# Altium PCB SC8701_EVM_RE1_0624_M6.PcbDoc
Units mm, origin at the board's own origin, x right, y up, seen from the top; angles counter-clockwise.
Board outline 100 x 65 mm, 2 copper layers (Top Layer, Bottom Layer), stack 1.535 mm thick; 126 components, 56 nets, 343 pads, 387 vias.
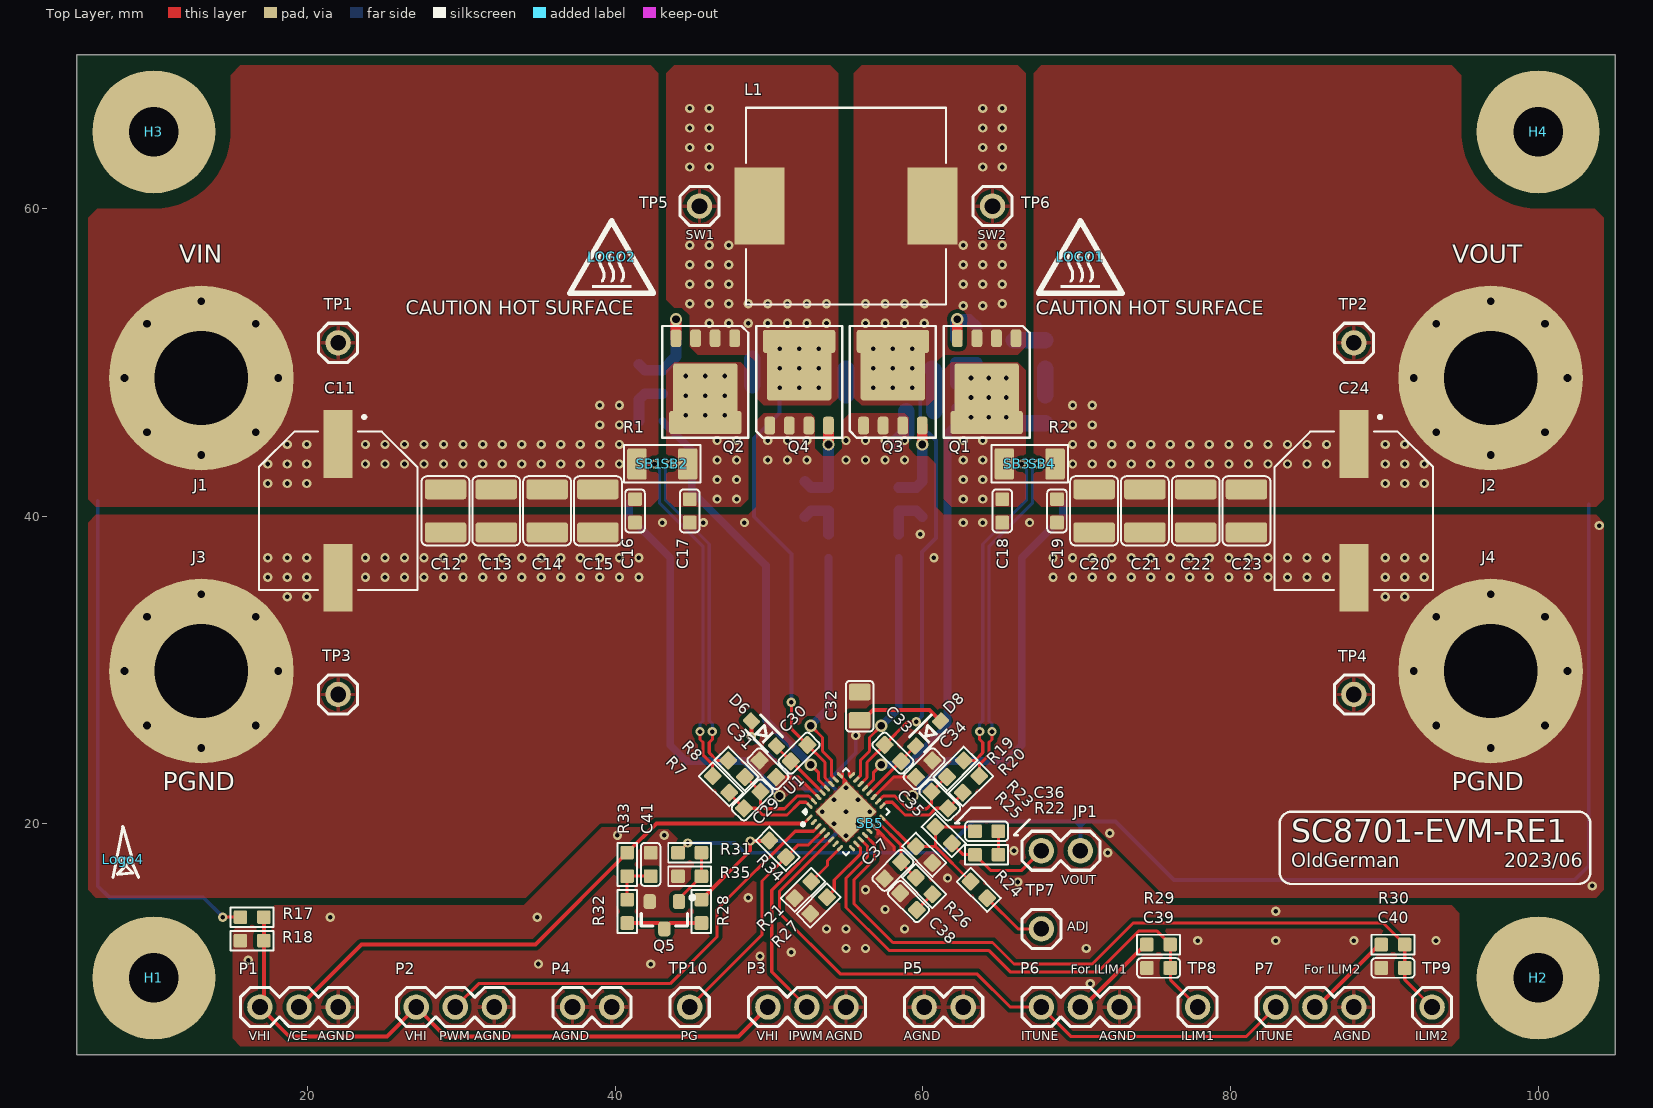
[diagram p0: Top Layer view]
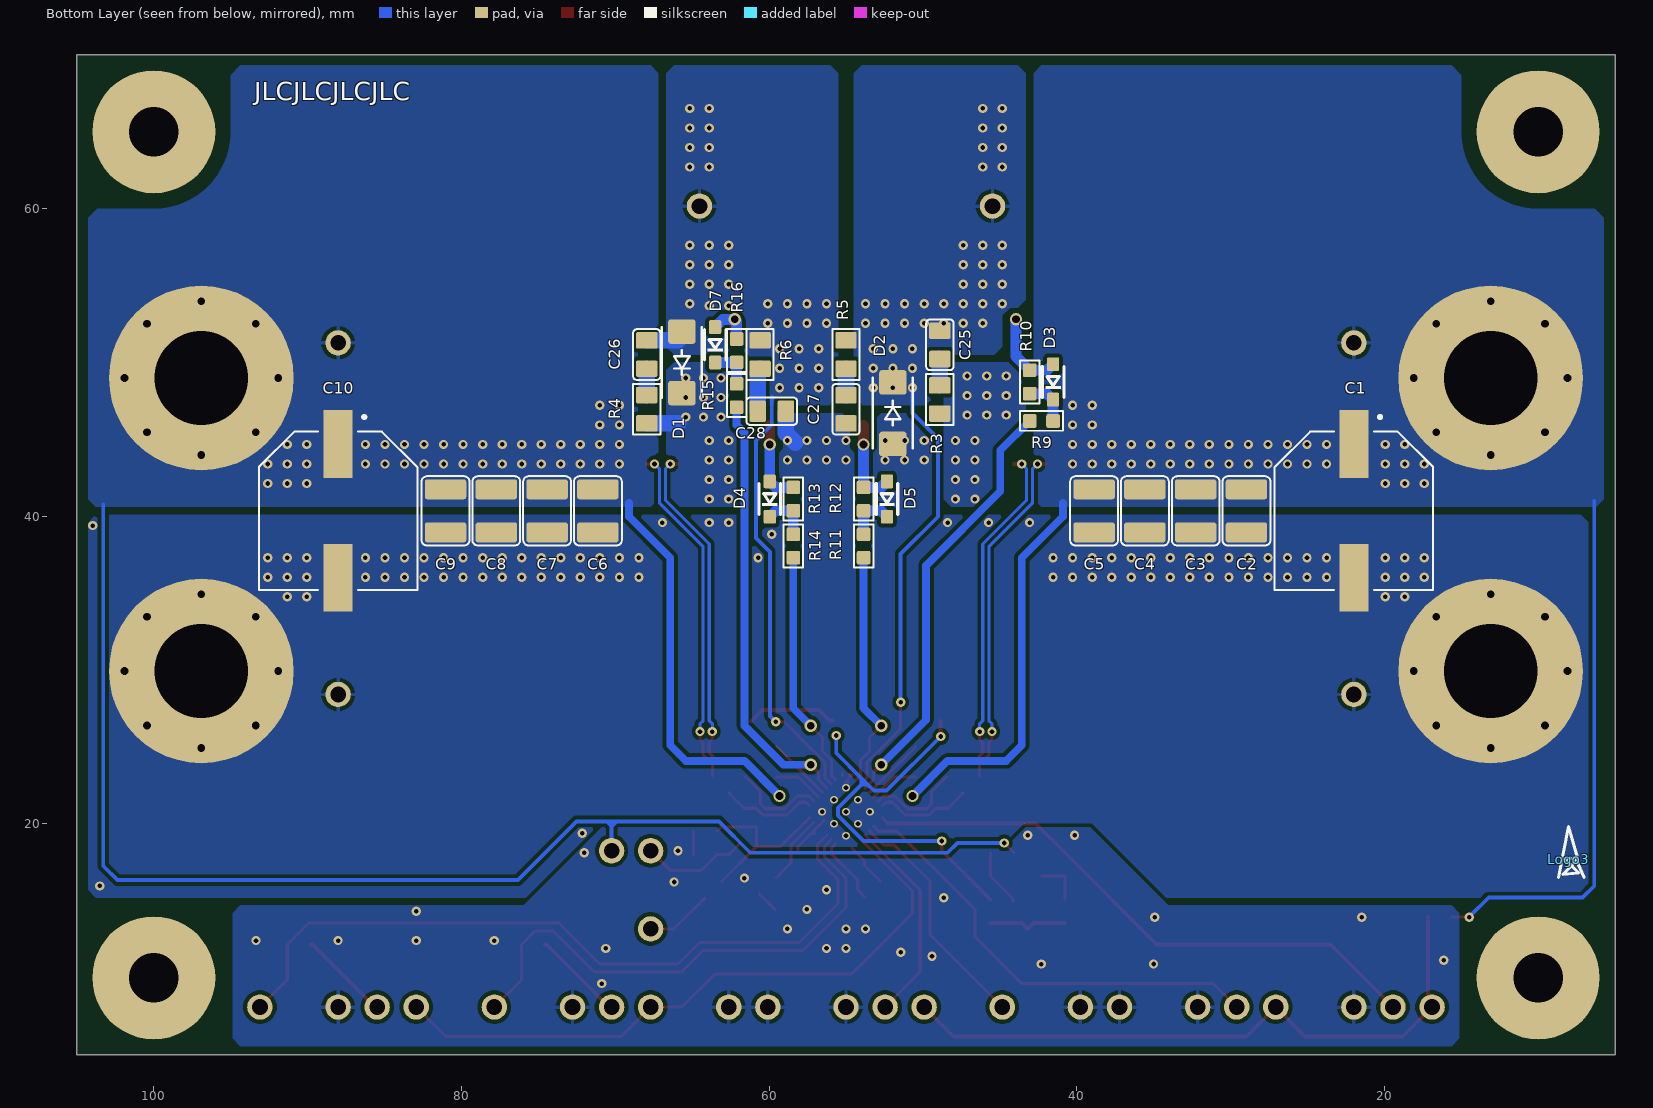
[diagram p1: Bottom Layer view, seen from below]
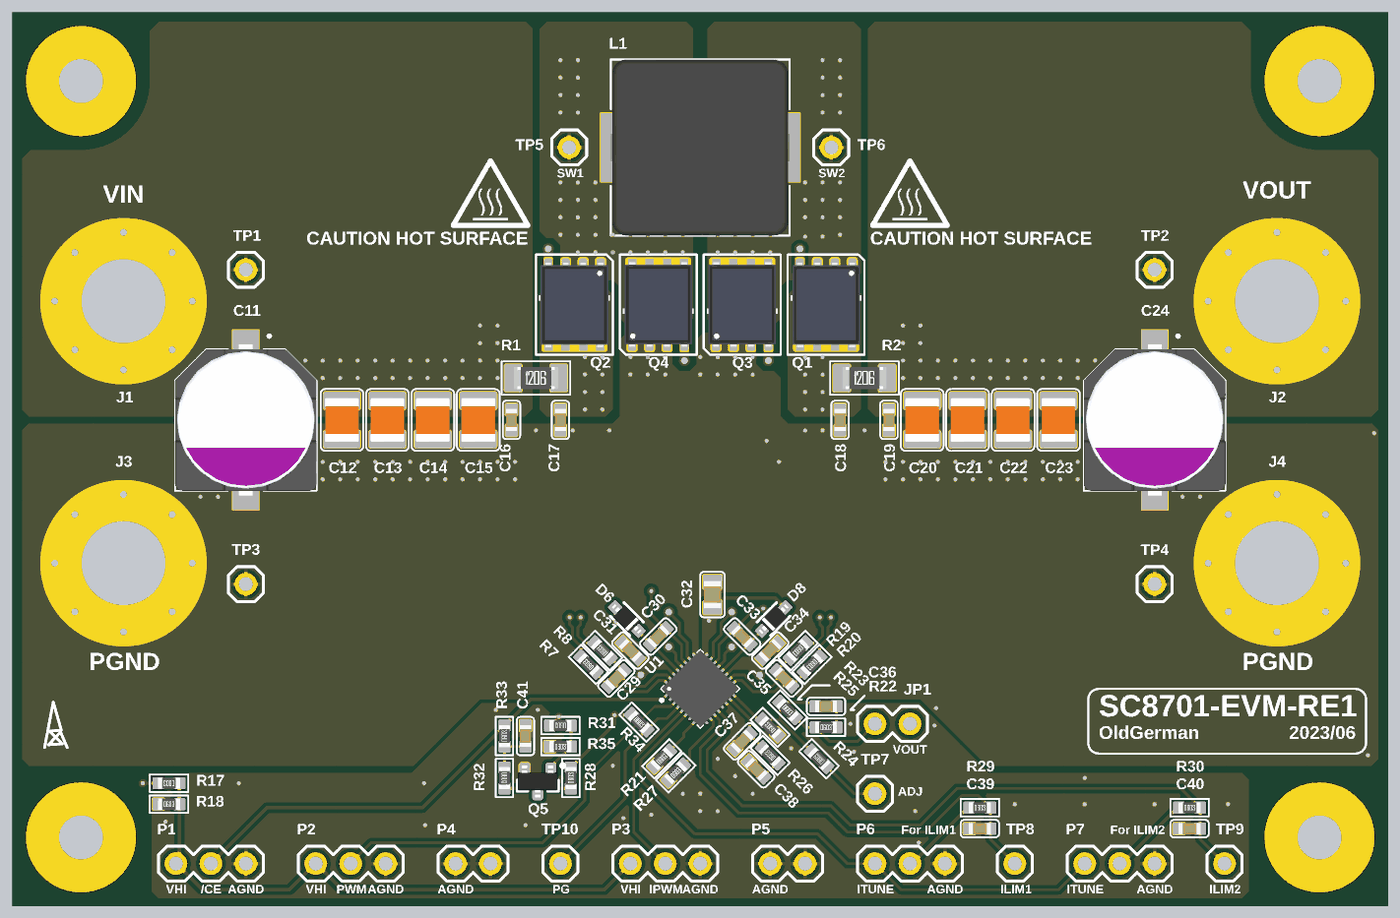
[diagram p2: 3D render of the assembled board from above, using the file's embedded part models]
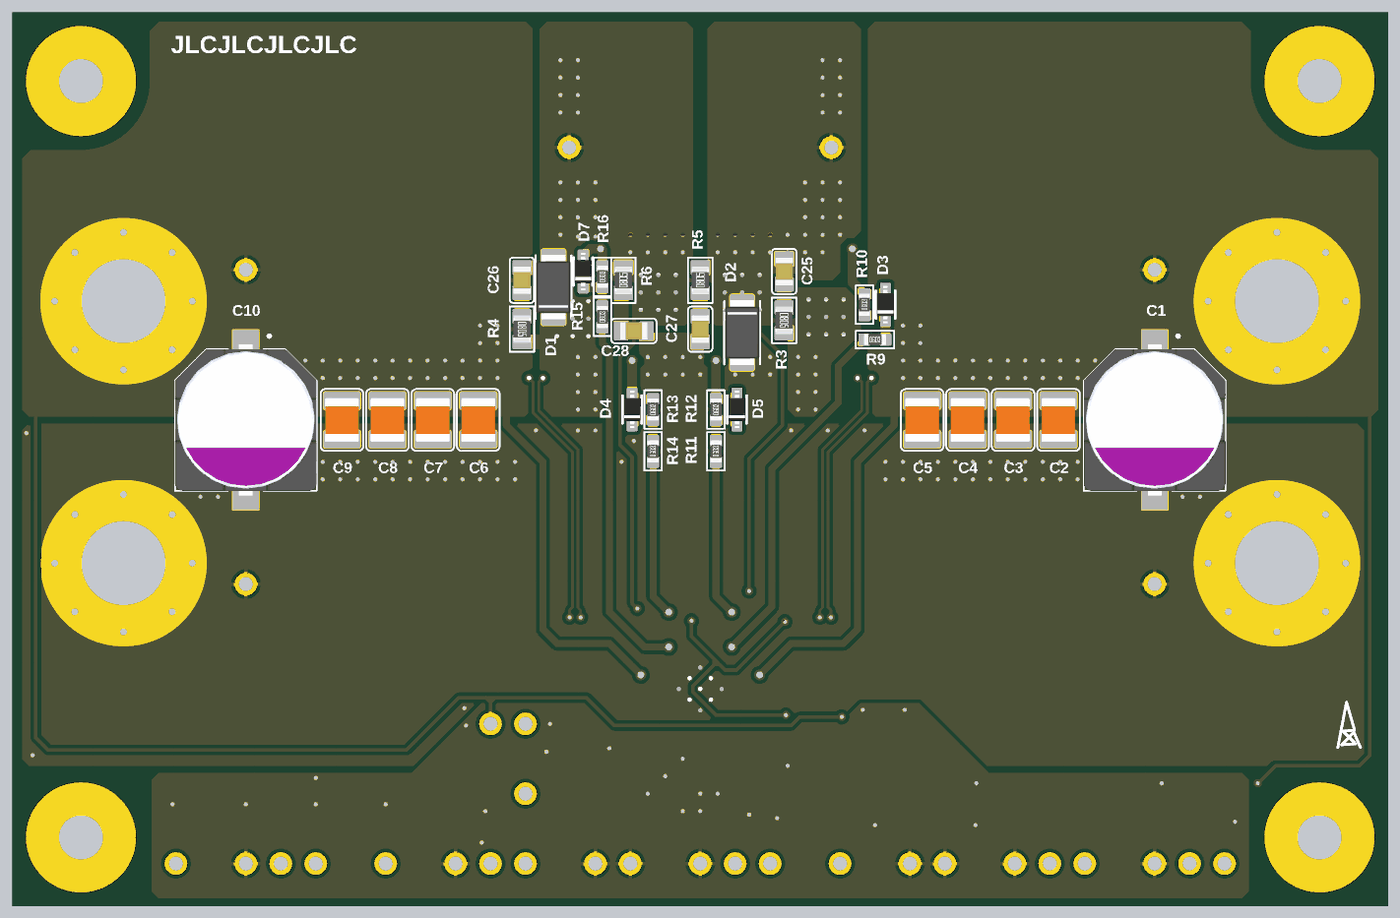
[diagram p3: 3D render of the assembled board from below, using the file's embedded part models]

## Layer stack, top to bottom
Top Solder: solder mask 0.0102, Solder Resist, Dk 3.5
Top Layer: signal copper 0.035
Dielectric2: core 1.465, Dk 4.2
Bottom Layer: signal copper 0.035
Bottom Solder: solder mask 0.0102, Solder Resist, Dk 3.5

## Board outline
5,5 5,70 105,70 105,5

## Design rules (kind name [scope] priority, off if disabled: settings)
BoardOutlineClearance [All] p1: gap=0.3 ignorepadtopadclearanceinfootprint=FALSE except(0: Arc-SplitContinuation Track-SplitContinuation SMDPad-SplitContinuation THPad-SplitContinuation Via-SplitContinuation Fill-SplitContinuation Poly-SplitContinuation Region-SplitContinuation Text-SplitContinuation)
Clearance "Stitching VOUT" [IsStitchingVia and InNet('VOUT') vs (IsVia and (Not IsStitchingVia)) Or IsPad] p1: gap=0.127 ignorepadtopadclearanceinfootprint=FALSE
Clearance "PGND vs via" [(InNet('GND') AND InPolygon) vs IsVia] p2: gap=0.305 ignorepadtopadclearanceinfootprint=FALSE except(0: Arc-Hole Track-Hole SMDPad-Hole THPad-Hole Via-Hole Fill-Hole Poly-Hole Region-Hole Text-Hole)
Clearance "pour clearance_1" [InPolygon] p3: gap=0.254 ignorepadtopadclearanceinfootprint=FALSE except(0: Arc-Hole Track-Hole SMDPad-Hole THPad-Hole Via-Hole Fill-Hole Poly-Hole Region-Hole Text-Hole)
Clearance [All] p4: gap=0.198 ignorepadtopadclearanceinfootprint=FALSE except(0: Arc-Hole Track-Hole SMDPad-Hole THPad-Hole Via-Hole Fill-Hole Poly-Hole Region-Hole Text-Hole; 0.15: Arc-Via Track-Via SMDPad-SMDPad)
DiffPairsRouting [All] p1: maxlimit=0.254 minlimit=0.2 mostfreqgap=0.2 toplayer_minwidth=0.2 toplayer_maxwidth=0.381 toplayer_prefwidth=0.2 bottomlayer_minwidth=0.2 bottomlayer_maxwidth=0.381 bottomlayer_prefwidth=0.2 maxuncoupledlength=12.7
HoleSize [All] p1: absolutevalues=TRUE maxlimit=6.858 minlimit=0.279 maxpercent=80.000 minpercent=20.000
MinimumSolderMaskSliver [All] p1: minsoldermaskwidth=0
PolygonConnect HOLE_J1-J4 [InComponent('J1') OR InComponent('J2') OR InComponent('J3') OR InComponent('J4')] p1: connectstyle=Direct reliefconductorwidth=0.254 reliefentries=4 polygonreliefangle="90 Angle" airgapwidth=0.254
PolygonConnect HOLE [All] p2: thpad.connectstyle=Relief thpad.reliefconductorwidth=0.254 thpad.reliefentries=4 thpad.polygonreliefangle="90 Angle" thpad.airgapwidth=0.254 smdpad.connectstyle=Direct smdpad.reliefconductorwidth=0.254 smdpad.reliefentries=4 smdpad.polygonreliefangle="90 Angle" smdpad.airgapwidth=0.254 via.connectstyle=Direct via.reliefconductorwidth=0.254 via.reliefentries=4 via.polygonreliefangle="90 Angle" via.airgapwidth=0.254
PolygonConnect [All] p3: connectstyle=Direct reliefconductorwidth=0.254 reliefentries=4 polygonreliefangle="90 Angle" airgapwidth=0.254
RoutingVias [All] p1: holewidth=0.3 width=0.6 viastyle="Through Hole" minholewidth=0.3 minwidth=0.6 maxholewidth=1 maxwidth=2
ShortCircuit [InNet('AGND') vs InNet('PGND')] p1: allowed=TRUE
SilkToSilkClearance [All] p1 off: silktosilkclearance=0.178
SilkToSolderMaskClearance [IsPad] p1 off: minsilkscreentomaskgap=0.178 clearancetoexposedcopper=TRUE
SolderMaskExpansion SolderMaskExpansion_Via [ObjectKind = 'Via'] p1: expansion=0.051 istentingtop=TRUE
SolderMaskExpansion [All] p2: expansion=0.051 istentingtop=FALSE
Width [All] p1: maxlimit=2.54 minlimit=0.2 preferedwidth=0.2
24 further rules are at their usual default settings.

## Classes and differential pairs
differential pair SNS2: +SNS2_P -SNS2_N
differential pair SNS1: +SNS1_P -SNS1_N
differential pair .SNS2: +.SNS2_P -.SNS2_N
differential pair .SNS1: +.SNS1_P -.SNS1_N

## Components (designator, comment, footprint, x,y, rotation, side; value= is the part's Value field where it differs from the comment)
C1 "100uF/50V" "CAP OS-CON D=10.0 L=10.0 F10" 21.98,40.358 r270 bottom
C2 "10uF/50V" C1210 28.965,40.358 r90 bottom
C3 "10uF/50V" C1210 32.267,40.358 r90 bottom
C4 "10uF/50V" C1210 35.569,40.358 r90 bottom
C5 "10uF/50V" C1210 38.871,40.358 r90 bottom
C6 "10uF/50V" C1210 71.129,40.358 r90 bottom
C7 "10uF/50V" C1210 74.431,40.358 r90 bottom
C8 "10uF/50V" C1210 77.733,40.358 r90 bottom
C9 "10uF/50V" C1210 81.035,40.358 r90 bottom
C10 "100uF/50V" "CAP OS-CON D=10.0 L=10.0 F10" 88.02,40.358 r270 bottom
C11 "100uF/50V" "CAP OS-CON D=10.0 L=10.0 F10" 21.98,40.358 r270 top
C12 "10uF/50V" C1210 28.965,40.358 r90 top
C13 "10uF/50V" C1210 32.267,40.358 r90 top
C14 "10uF/50V" C1210 35.569,40.358 r90 top
C15 "10uF/50V" C1210 38.871,40.358 r90 top
C16 "100nF/50V" C0603 41.284,40.358 r90 top
C17 "100nF/50V" C0603 44.84,40.358 r90 top
C18 "100nF/50V" C0603 65.16,40.358 r90 top
C19 "100nF/50V" C0603 68.716,40.358 r90 top
C20 "10uF/50V" C1210 71.129,40.358 r90 top
C21 "10uF/50V" C1210 74.431,40.358 r90 top
C22 "10uF/50V" C1210 77.733,40.358 r90 top
C23 "10uF/50V" C1210 81.035,40.358 r90 top
C24 "100uF/50V" "CAP OS-CON D=10.0 L=10.0 F10" 88.02,40.358 r270 top
C25 "NPO/NC" C0805 48.897,51.152 r270 bottom
C26 "NPO/NC" C0805 67.954,50.518 r270 bottom
C27 "NPO/NC" C0805 55,46.962 r90 bottom
C28 "NPO/NC" C0805 59.826,46.835 r0 bottom
C29 "47pF/6.3V" C0603 48.904,21.562 r45 top
C30 "100nF/16V" C0603 51.952,24.61 r45 top
C31 "1uF/50V" C0603 49.92,23.594 r135 top
C32 "1uF/25V" C0805 55.889,27.658 r90 top
C33 "100nF/16V" C0603 58.048,24.61 r315 top
C34 "1uF/50V" C0603 60.08,23.594 r45 top
C35 "47pF/6.3V" C0603 61.096,21.562 r315 top
C36 "NC" C0603 64.144,19.53 r0 top
C37 "NC" C0603 58.048,16.99 r45 top
C38 "15nF/6.3V" C0603 59.064,14.958 r315 top
C39 "10nF/6.3V" C0603 75.32,10.64 r0 top
C40 "10nF/6.3V" C0603 90.56,10.64 r0 top
C41 "1uF/50V" C0603 42.3,17.371 r90 top
D1 "SS54F" SMAF 65.668,50.01 r270 bottom
D2 "SS54F" SMAF 51.952,46.708 r90 bottom
D3 "1N4148" SOD-323 41.538,48.74 r270 bottom
D4 "1N4148" SOD-323 59.953,41.12 r270 bottom
D5 "1N4148" SOD-323 52.333,41.12 r270 bottom
D6 "1N4148" SOD-323 49.666,25.88 r315 top
D7 "1N4148" SOD-323 63.509,51.153 r270 bottom
D8 "1N4148" SOD-323 60.334,25.88 r225 top
H1 "HOLE" "M3.2 D=8" 10,10 r0 top
H2 "HOLE" "M3.2 D=8" 100,10 r0 top
H3 "HOLE" "M3.2 D=8" 10,65 r0 top
H4 "HOLE" "M3.2 D=8" 100,65 r0 top
J1 "U6047" JACK_BANANA_4MM_M6_GE 13.09,48.994 r180 top
J2 "U6047" JACK_BANANA_4MM_M6_GE 96.91,48.994 r270 top
J3 "U6047" JACK_BANANA_4MM_M6_GE 13.09,29.944 r180 top
J4 "U6047" JACK_BANANA_4MM_M6_GE 96.91,29.944 r270 top
JP1 "CONN_X2_DOT" 2.54mm_Male_x2 70.24,18.26 r180 top
L1 "3.3uH" "INDUCTOR 1350 12.6X13.5X5.0mm" 55,60.17 r0 top locked
LOGO1 "CAUTION HOT SURFACE" IEC_HotSurface_Small 70.24,56.868 r0 top
LOGO2 "CAUTION HOT SURFACE" IEC_HotSurface_Small 39.76,56.868 r0 top
Logo3 "OldGerman Symbol" ODG_LOGO 8.01,17.701 r180 bottom
Logo4 "OldGerman Symbol" ODG_LOGO 8.01,17.701 r0 top
P1 "CONN_X3" 2.54mm_Male_x3 16.9,8.1 r0 top
P2 "CONN_X3" 2.54mm_Male_x3 32.14,8.1 r180 top
P3 "CONN_X3" 2.54mm_Male_x3 55,8.1 r180 top
P4 "CONN_X2" 2.54mm_Male_x2 37.22,8.1 r0 top
P5 "CONN_X2" 2.54mm_Male_x2 60.08,8.1 r0 top
P6 "CONN_X3" 2.54mm_Male_x3 67.7,8.1 r0 top
P7 "CONN_X3" 2.54mm_Male_x3 88.02,8.1 r180 top
Q1 "N-MOS_GDS" "SO8FL ROUND" 64.144,48.74 r270 top
Q2 "N-MOS_GDS" "SO8FL ROUND" 45.856,48.74 r270 top
Q3 "N-MOS_GDS" "SO8FL ROUND" 58.048,48.74 r90 top
Q4 "N-MOS_GDS" "SO8FL ROUND" 51.952,48.74 r90 top
Q5 "N-MOS" "INFINEON SOT-23-3" 43.189,14.069 r270 top
R1 "10mR" R1206 43.062,43.406 r0 top
R2 "10mR" R1206 66.938,43.406 r0 top
R3 "NC" R0805 48.904,47.597 r270 bottom
R4 "NC" R0805 67.954,46.962 r270 bottom
R5 "NC" R0805 55,50.518 r90 bottom
R6 "NC" R0805 60.588,50.518 r90 bottom
R7 "1K" R0603 46.872,22.578 r135 top
R8 "1K" R0603 47.888,23.594 r135 top
R9 "0R" R0603 42.3,46.2 r180 bottom
R10 "0R" R0603 43.062,48.74 r90 bottom
R11 "0R" R0603 53.857,38.072 r90 bottom
R12 "0R" R0603 53.857,41.12 r90 bottom
R13 "0R" R0603 58.429,41.12 r90 bottom
R14 "0R" R0603 58.429,38.072 r90 bottom
R15 "0R" R0603 62.112,47.851 r90 bottom
R16 "0R" R0603 62.112,50.772 r90 bottom
R17 "100K" R0603 16.392,13.942 r180 top
R18 "150K" R0603 16.392,12.418 r0 top
R19 "1K" R0603 62.112,23.594 r225 top
R20 "1K" R0603 63.128,22.578 r225 top
R21 "0R" R0603 52.206,15.72 r45 top
R22 "NC" R0603 64.144,18.006 r0 top
R23 "100K" R0603 61.35,19.276 r315 top
R24 "NC" R0603 63.636,15.72 r135 top
R25 "32.4K" R0603 60.08,18.006 r135 top
R26 "15K" R0603 60.08,15.974 r135 top
R27 "68K" R0603 53.222,14.704 r45 top
R28 "200K" R0603 45.602,14.323 r90 top
R29 "12.1K" R0603 75.32,12.164 r0 top
R30 "40.2K" R0603 90.56,12.164 r0 top
R31 "10K" R0603 44.84,18.133 r180 top
R32 "100K" R0603 40.776,14.323 r270 top
R33 "100K" R0603 40.776,17.371 r90 top
R34 "100K" R0603 50.555,18.387 r315 top
R35 "24K" R0603 44.84,16.609 r0 top
SB1 "NetTie_200um" NetTie_200um 42.254,43.406 r180 top net-tie
SB2 "NetTie_200um" NetTie_200um 43.87,43.406 r0 top net-tie
SB3 "NetTie_200um" NetTie_200um 66.13,43.406 r180 top net-tie
SB4 "NetTie_200um" NetTie_200um 67.746,43.406 r0 top net-tie
SB5 "NetTie_200um" NetTie_200um 56.591,20.058 r135 top net-tie
TP1 "CONN_X1_DOT" 2.54mm_Male_x1 21.98,51.28 r0 top
TP2 "CONN_X1_DOT" 2.54mm_Male_x1 88.02,51.28 r0 top
TP3 "CONN_X1_DOT" 2.54mm_Male_x1 21.98,28.42 r0 top
TP4 "CONN_X1_DOT" 2.54mm_Male_x1 88.02,28.42 r90 top
TP5 "CONN_X1_DOT" 2.54mm_Male_x1 45.475,60.17 r0 top
TP6 "CONN_X1_DOT" 2.54mm_Male_x1 64.525,60.17 r0 top
TP7 "CONN_X1_DOT" 2.54mm_Male_x1 67.7,13.18 r0 top
TP8 "CONN_X1_DOT" 2.54mm_Male_x1 77.86,8.1 r180 top
TP9 "CONN_X1_DOT" 2.54mm_Male_x1 93.1,8.1 r180 top
TP10 "CONN_X1_DOT" 2.54mm_Male_x1 44.84,8.1 r0 top
U1 "SC8701 (A)" "TQFN-32 4X4MM 0.4 VIA" 55,20.8 r45 top locked

## Footprints (in the part's own frame and the unit in brackets; to place one, negate y for a bottom-side part, rotate by r counter-clockwise, add the part's x,y. Pads: shape width x height; smd on the part's side, far side on the other; paste and mask are expansions set on the pad)
2.54mm_Male_x1 [mm]
  round 1.65 hole 1.016: 1(0,0)
  silkscreen extent -1.27,-1.27 1.27,1.27
2.54mm_Male_x2 [mm]
  round 1.65 hole 1.016: 1(0,0) 2(2.54,0)
  silkscreen extent -1.27,-1.27 3.81,1.27
2.54mm_Male_x3 [mm]
  round 1.65 hole 1.016: 1(0,0) 2(2.54,0) 3(5.08,0)
  silkscreen extent -1.27,-1.27 6.35,1.27
C0603 [mil]
  rrect20% 35x35 smd: 1(-30,0) 2(30,0)
  silkscreen extent -55,-25 55,25, body extent -31,-16 32,16, height 32
C0805 [mil]
  rrect20% 42.5x55 smd: 1(-36.26,0) 2(36.26,0)
  silkscreen extent -65,-35 65,35, body extent -39,-25 39,25, height 49
C1210 [mm] "Chip Capacitor, 2-Leads, Body 3.20x2.50mm, IPC Medium Density"
  rrect25% 1.3x2.7 smd: 1(-1.4,0) 2(1.4,0)
  silkscreen extent -2.25,-1.55 2.25,1.55, body extent -1.6,-1.25 1.6,1.25, height 2.8
"CAP OS-CON D=10.0 L=10.0 F10" [mm]
  rect 4.4x1.9 smd: 1(-4.35,0) 2(4.35,0)
  silkscreen extent -6.2,-5.15 5.15,5.15, body extent -5.5,-5.15 5.5,5.15, height 10.4
IEC_HotSurface_Small [mm] "CAUTION HOT SURFACE"
  silkscreen extent -2.72,-2.36 2.72,2.35
"INDUCTOR 1350 12.6X13.5X5.0mm" [mm]
  rect 3.25x5 smd: 1(-5.625,0) 2(5.625,0)
  silkscreen extent -6.5,-6.4 6.5,6.4, body extent -6.5,-6.4 6.5,6.4, height 6.2
"INFINEON SOT-23-3" [mm] "SOT23, 3-Leads, Body 2.90x2.40mm, Pitch 0.95mm, IPC Medium Density"
  rrect50% 0.972x0.802 smd: 1(-0.885,0.95) 2(-0.885,-0.95) 3(0.885,0)
  silkscreen extent -1.27,-1.5 0.7,1.95, body extent -1.16,-1.45 1.16,1.45, height 1
JACK_BANANA_4MM_M6_GE [mm] "Banana Jack"
  round 12 hole 6.1: 1(0,0)
"M3.2 D=8" [mm]
  round 8 hole 3.2: 1(0,0)
NetTie_200um [mm]
  round 0.2 smd paste-2 mask-2: 1(-0.3,0) 2(0.3,0)
  Top Layer region: -0.3,0.1 -0.3,-0.1 0.3,-0.1 0.3,0.1
ODG_LOGO [mm]
  silkscreen extent -0.66,-1.17 0.99,2.13
R0603 [mil]
  rrect25% 35x35 smd: 1(-30,0) 2(30,0)
  silkscreen extent -55,-25 55,25, body extent -31,-16 31,16, height 18
R0805 [mil]
  rrect20% 42.5x55 smd: 1(-36.26,0) 2(36.26,0)
  silkscreen extent -65,-35 65,35, body extent -39,-25 39,25, height 24
R1206 [mil]
  rrect20% 50x80 smd: 1(-65,0) 2(65,0)
  silkscreen extent -98,-48 98,48, body extent -63,-31 63,31, height 24
SMAF [mm]
  rrect25% 1.6x1.8 smd: 1(-2,0) 2(2,0)
  silkscreen extent -2.3,-1.3 2.3,1.3, body extent -2.35,-1.25 2.35,1.25, height 1.1
"SO8FL ROUND" [mm] "AND9137/D Universal Footprint"
  rrect12% 3.3x4.2 smd paste-10: D(0.438,0)
  rrect20% 1.5x4.7 smd paste-10: D(2.638,0)
  rrect50% 1.15x0.7 smd paste-0.05: G(-2.837,-1.905) S(-2.837,1.905) S(-2.837,-0.635) S(-2.837,0.635)
  rect 0.6x0.9 on Top Paste: ""(-0.662,1.15) ""(-0.662,0) ""(-0.662,-1.15) ""(0.188,1.15) ""(0.188,0) ""(0.188,-1.15) ""(1.038,1.15) ""(1.038,0) ""(1.038,-1.15) ""(1.888,1.15) ""(1.888,0) ""(1.888,-1.15)
  rect 0.9x0.6 on Top Paste: ""(2.888,1.875) ""(2.888,-0.65) ""(2.888,0.65) ""(2.888,-1.875)
  silkscreen extent -3.64,-2.79 3.64,2.8, body extent -3.06,-2.58 3.09,2.57, height 1.13
SOD-323 [mm] "AND9137/D：Universal Footprint for  SO8FL Package"
  rrect25% 0.9x0.8 smd: 1(-1.15,0) 2(1.15,0)
  silkscreen extent -1,-0.7 1,0.7, body extent -1.36,-0.62 1.36,0.63, height 1.05
"TQFN-32 4X4MM 0.4 VIA" [mm]
  oval 0.5x0.2 smd: 1(-1.95,1.4) 2(-1.95,1) 3(-1.95,0.6) 4(-1.95,0.2) 5(-1.95,-0.2) 6(-1.95,-0.6) 7(-1.95,-1) 8(-1.95,-1.4) 17(1.95,-1.4) 18(1.95,-1) 19(1.95,-0.6) 20(1.95,-0.2) 21(1.95,0.2) 22(1.95,0.6) 23(1.95,1) 24(1.95,1.4)
  oval 0.2x0.5 smd: 9(-1.4,-1.95) 10(-1,-1.95) 11(-0.6,-1.95) 12(-0.2,-1.95) 13(0.2,-1.95) 14(0.6,-1.95) 15(1,-1.95) 16(1.4,-1.95) 25(1.4,1.95) 26(1,1.95) 27(0.6,1.95) 28(0.2,1.95) 29(-0.2,1.95) 30(-0.6,1.95) 31(-1,1.95) 32(-1.4,1.95)
  rect 2.8x2.8 smd paste-5: 33(0,0)
  silkscreen extent -2.66,-2 2,2, body extent -2,-2 2,2, height 0.55

## Part data
C1 C10 C11 C24: library part CAP_Polar_Aluminum, "Capacitor"
C2 C3 C4 C5 C6 C7 C8 C9 C12 C13 C14 C15 C16 C17 C18 C19 C20 C21 C22 C23 C25 C26 C27 C28 C29 C30 C31 C32 C33 C34 C35 C36 C37 C38 C39 C40 C41: library part CAP, "Capacitor"
D1 D2 D3 D4 D5 D6 D7 D8: library part Diode, "二极管"
J1 J2 J3 J4: library part JACK_BANANA, "Banana Jack", Manufacturer=Keystone, PartNumber=575-8, Supplier Part Number 1=36-575-8-ND, ComponentLink1Description="Datasheet Link", ComponentLink1URL=http://www.keyelco.com/pdfs/M55p95.pdf, CompType=Connector, LatestRevisionDate=2015-08-25, MountType=TH, PackageReference=Keystone575-8, Publisher="Texas Instruments", RoHS=Y, Supplier 1=Digi-Key, U/M=EA
L1: library part Inductor_power, "135 功率电感 额定电流15A"
LOGO1 LOGO2: library part IEC_HotSurface, "IEC 61010-1 Hot Surface Warning", LatestRevisionDate=2014-11-20, Published=2009-03-03, Publisher="Texas Instruments", SymbolCreator=a0412235, SymbolVersion=2011-08-22
Logo3 Logo4: library part OldGeman, LatestRevisionDate=2014-11-20, Published=2009-03-03, Publisher="Texas Instruments", SymbolCreator=a0412235, SymbolVersion=2011-08-22
Q5: library part N-MOS_123
R1 R2 R3 R4 R5 R6 R7 R8 R9 R10 R11 R12 R13 R14 R15 R16 R17 R18 R19 R20 R21 R22 R23 R24 R25 R26 R27 R28 R29 R30 R31 R32 R33 R34 R35: library part RES, "IEC Standard"
SB1 SB2 SB3 SB4 SB5: library part "NetTie 0.2mm", "Net Tie", Part number IPS=N.A., Artikkelnr Noca=N.A., Component Class=Connectors, ComponentLink1Description=Datasheet, ComponentLink2Description="Supplier link", Footprint Doc=NetTie, LatestRevisionDate=2019-10-07, Pad Count=2, Part Number="NetTie 0.2mm", PartId=100500654, Pin Count=2, Published=2019-10-07, Publisher="Nordic Semiconductor"
U1: "高效率, 同步, 4 管升降压控制器"

## Via types
v1: diameter 0.6, hole 0.3, Top Layer to Bottom Layer, tented both sides, 336 vias
v2: diameter 0.8, hole 0.5, Top Layer to Bottom Layer, tented both sides, 42 vias
v3: diameter 0.5, hole 0.3, Top Layer to Bottom Layer, tented both sides, 9 vias

## Nets (pads, with @x,y where several pads share a name; then routed paths per layer and width w, separated by ;. In a path a pad name is that pad's centre, name@x,y a point inside that pad or via, vN(x,y) a via of type N, cw(c..) or ccw(c..) an arc to the next point about the centre after c; other vN are vias at no path point)
.SNS1_N: C29.2 R8.1 U1.31 | length 6.3
  Top Layer w0.2: R8.1 48.488,23.055 C29.2 49.443,21.306 49.758,20.99 51,20.99 51.825,21.816 52.57,21.816 U1.31
.SNS1_P: C29.1 R7.1 U1.32 | length 6.3
  Top Layer w0.2: R7.1 47.411,21.978 C29.1 49.16,21.023 49.593,20.59 51.165,20.59 51.991,21.416 52.404,21.416 U1.32
.SNS2_N: C35.2 R20.2 U1.17 | length 6.3
  Top Layer w0.2: U1.17 57.596,21.416 58.009,21.416 58.835,20.59 60.407,20.59 60.84,21.023 C35.2 62.589,21.978 R20.2
.SNS2_P: C35.1 R19.2 U1.18 | length 6.3
  Top Layer w0.2: U1.18 57.43,21.816 58.175,21.816 59.001,20.99 60.242,20.99 60.557,21.306 C35.1 61.512,23.055 R19.2
/CE: P1.2 R33.2 U1.1 | length 38.3
  Top Layer w0.2: 52.258,20.038 U1.1
  Top Layer w0.254: P1.2 23.504,12.164 34.807,12.164 R33.2 42.681,20.038 52.258,20.038
AGND: C37.1 C38.1 C39.1 C40.1 C41.2 P1.3 P2.1 P3.1 P4.1 P4.2 P5.1 P5.2 P6.3 P7.1 Q5.2 R18.1 R21.1 R25.1 R27.1 R35.1 SB5.1 U1.14 | length 2.3
  Top Layer w0.2: U1.14 58.125,18.523 58.125,18.301 ; 57.07,19.356 57.07,19.578
  other v1: 70.875,9.624 35.001,10.896 42.3,10.894 16.138,11.148 49.412,11.402 51.444,11.656 55,11.91 56.27,11.91 70.621,11.91 77.86,12.418 82.94,12.418 88.02,12.418 93.354,12.418 53.73,13.18 55,13.18 58.81,13.18 21.472,13.942 34.934,13.942 82.94,14.323 57.54,14.45 48.65,15.212 56.27,15.72 66.176,16.228 61.604,16.482 72.018,18.133 65.922,18.26 40.141,19.276 43.189,19.276
ILIM1: C39.2 R29.2 TP8.1 U1.11 | length 34.3
  Top Layer w0.2: U1.11 56.397,18.554 56.397,17.879 55,16.482 55,14.577 57.794,11.783 64.271,11.783 65.668,10.386 71.383,10.386 74.05,13.053 75.193,13.053 R29.2 C39.2 76.082,9.878 TP8.1
ILIM2: C40.2 R30.2 TP9.1 U1.12 | length 49.2
  Top Layer w0.2: U1.12 56.842,18.676 56.842,17.688 55.508,16.355 55.508,14.831 58.048,12.291 64.525,12.291 65.922,10.894 71.002,10.894 73.669,13.561 89.925,13.561 R30.2 C40.2 91.322,9.878 TP9.1
IPWM: P3.2 U1.5 | length 13.6
  Top Layer w0.2: P3.2 50.174,10.386 50.174,15.691 U1.5
ITUNE: P6.1 P7.3 U1.6 | length 42.6
  Top Layer w0.2: U1.6 50.682,15.633 50.682,14.196 54.619,10.259 63.509,10.259 65.668,8.1 P6.1 69.605,6.195 81.035,6.195 P7.3
NetC17_2: C17.2 Q2.D R1.2 R3.2 SB2.2
  other v1: 46.618,41.12 47.888,41.12 46.618,42.39 47.888,42.39 46.618,43.66 47.888,43.66 46.618,44.93 47.888,44.93 44.586,46.581 45.856,46.581 47.126,46.581 44.586,47.851 45.856,47.851 47.126,47.851 44.586,49.121 45.856,49.121 47.126,49.121
NetC18_2: C18.2 D1.2 Q1.D R2.1 R4.2 SB3.2 | length 2
  Bottom Layer w1.079: 65.922,46.041 R4.2
  other v1: 62.62,41.12 63.89,41.12 62.62,42.39 63.89,42.39 62.62,43.66 63.89,43.66 62.62,44.93 63.89,44.93 63.128,46.454 64.271,46.454 65.414,46.454 63.128,47.724 64.271,47.724 65.414,47.724 63.128,48.994 64.271,48.994 65.414,48.994
NetC25_1: C25.1 C30.2 D2.2 L1.1 Q2.S Q4.D R5.2 TP5.1 U1.27 | length 28.5
  Top Layer w0.2: v1(51.444,27.912) 51.444,26.196 C30.2 53.635,24.005 53.635,23.014 U1.27
  Bottom Layer w0.254: v1(50.682,48.359) 50.682,46.708 49.031,45.057 49.031,39.977 51.444,37.564 v1(51.444,27.912)
  other v1: 51.952,48.359 53.222,48.359 50.682,49.629 51.952,49.629 53.222,49.629 50.682,50.899 51.952,50.899 53.222,50.899 46.11,52.55 47.38,52.55 48.65,52.55 49.92,52.55 51.19,52.55 52.46,52.55 53.73,52.55 44.84,53.82 46.11,53.82 47.38,53.82 48.65,53.82 49.92,53.82 51.19,53.82 52.46,53.82 53.73,53.82 44.84,55.09 46.11,55.09 47.38,55.09 44.84,56.36 46.11,56.36 47.38,56.36 44.84,57.63 46.11,57.63 47.38,57.63 44.84,62.71 46.11,62.71 44.84,63.98 46.11,63.98 44.84,65.25 46.11,65.25 44.84,66.52 46.11,66.52
NetC25_2: C25.2 R3.1 | length 1.7
  Bottom Layer w1.079: R3.1@48.901,48.527 C25.2@48.901,50.232
NetC26_1: C26.1 C33.1 D1.1 L1.2 Q1.S Q3.D R6.2 TP6.1 U1.22 | length 30
  Top Layer w0.2: U1.22 56.365,23.014 56.365,24.005 C33.1 59.002,26.642 v1(59.572,26.642)
  Bottom Layer w0.254: v1(59.572,26.642) 59.953,27.023 59.953,37.691 60.842,38.58 60.842,44.93 59.826,45.946 59.826,47.755
  Bottom Layer w1.079: D1.1@65.922,51.439 C26.1
  other v1: 56.778,48.359 58.048,48.359 59.318,48.359 56.778,49.629 58.048,49.629 59.318,49.629 56.778,50.899 58.048,50.899 59.318,50.899 56.27,52.55 57.54,52.55 58.81,52.55 60.08,52.55 62.62,53.693 63.89,53.693 56.27,53.82 57.54,53.82 58.81,53.82 60.08,53.82 65.16,53.82 62.62,55.09 63.89,55.09 65.16,55.09 62.62,56.36 63.89,56.36 65.16,56.36 62.62,57.63 63.89,57.63 65.16,57.63 63.89,62.71 65.16,62.71 63.89,63.98 65.16,63.98 63.89,65.25 65.16,65.25 63.89,66.52 65.16,66.52
NetC26_2: C26.2 R4.1 | length 1.7
  Bottom Layer w1.079: R4.1 C26.2
NetC27_2: C27.2 R5.1 | length 1.7
  Bottom Layer w1.079: C27.2 R5.1
NetC28_2: C28.2 R6.1 | length 2.8
  Bottom Layer w1.079: R6.1 60.747,49.438 C28.2
NetC30_1: C30.1 D6.2 U1.29 | length 4.3
  Top Layer w0.2: D6.2 50.479,25.005 C30.1 51.446,24.071 U1.29
NetC33_2: C33.2 D8.2 U1.20 | length 4.3
  Top Layer w0.2: U1.20 C33.2@58.554,24.071 ; C33.2 58.587,24.133 D8.2
NetC36_1: C36.1 R23.1 R24.2 R25.2 U1.16 | length 11.4
  Top Layer w0.2: U1.16 59.235,18.545 R25.2 60.811,18.545 ; R24.2 60.811,18.545 ; C36.1 63.097,19.815 R23.1 60.811,18.545
NetC36_2: C36.2 R22.2 | length 1.5
  Top Layer w0.2: R22.2 C36.2
NetC37_2: C37.2 R26.2 U1.15 | length 4.6
  Top Layer w0.2: U1.15 58.587,18.627 C37.2 58.587,17.467 R26.2
NetC38_2: C38.2 R26.1 | length 1.4
  Top Layer w0.2: C38.2 R26.1
NetC41_1: C41.1 R32.1 R33.1 | length 3
  Top Layer w0.2: R32.1 R33.1 C41.1
NetD3_1: D3.1 Q2.G R10.2 | length 6.6
  Top Layer w0.7: Q2.G v2(43.951,52.804)
  Bottom Layer w0.7: D3.1 41.926,49.502 R10.2 43.951,50.391 v2(43.951,52.804)
NetD3_2: D3.2 R9.2 R10.1 | length 3.1
  Bottom Layer w0.7: R9.2 D3.2 41.926,47.978 R10.1
NetD4_1: D4.1 Q3.G R13.2 | length 5.3
  Top Layer w0.7: v2(59.953,44.676) Q3.G
  Bottom Layer w0.7: R13.2 59.565,41.882 D4.1 v2(59.953,44.676)
NetD4_2: D4.2 R13.1 R14.2 | length 3.2
  Bottom Layer w0.7: R14.2 R13.1 59.565,40.358 D4.2
NetD5_1: D5.1 Q4.G R12.2 | length 5.7
  Top Layer w0.7: v2(53.857,44.676) Q4.G
  Bottom Layer w0.7: D5.1 52.721,41.882 R12.2 v2(53.857,44.676)
NetD5_2: D5.2 R11.2 R12.1 | length 3.2
  Bottom Layer w0.7: D5.2 52.721,40.358 R12.1 R11.2
NetD7_1: D7.1 Q1.G R16.2 | length 4
  Top Layer w0.7: Q1.G v2(62.239,52.804)
  Bottom Layer w0.7: R16.2 62.112,52.677 v2(62.239,52.804) 63.008,52.804 D7.1
NetD7_2: D7.2 R15.2 R16.1 | length 2.8
  Bottom Layer w0.7: R15.2 R16.1 63.502,50.01 D7.2
NetJP1_2: JP1.2 R22.1 R23.2 | length 7.1
  Top Layer w0.2: R23.2 62.62,18.006 R22.1 64.398,16.99 66.43,16.99 JP1.2
NetP6_2: P6.2 R29.1 | length 6
  Top Layer w0.254: P6.2 70.4,8.1 74.464,12.164 R29.1
NetP7_2: P7.2 R30.1 | length 6
  Top Layer w0.254: P7.2 85.614,8.1 89.678,12.164 R30.1
NetQ5_1: Q5.1 R31.1 R35.2 | length 3.8
  Top Layer w0.2: Q5.1 44.139,15.146 R35.2 R31.1
NetQ5_3: Q5.3 R28.1 R32.2 | length 5.1
  Top Layer w0.254: R32.2 42.812,13.561 Q5.3 43.566,13.561 R28.1
NetR9_1: R9.1 U1.28 | length 28.3
  Top Layer w0.2: v2(52.714,23.848) 53.222,23.34 53.222,22.861 U1.28
  Bottom Layer w0.508: R9.1 44.967,44.295 44.967,41.628 49.793,36.802 49.793,26.769 v2(52.714,23.848)
NetR11_1: R11.1 U1.26 | length 15.6
  Top Layer w0.2: v2(52.714,26.388) 53.476,25.626 53.476,24.737 54.048,24.165 54.048,23.167 U1.26
  Bottom Layer w0.508: v2(52.714,26.388) 53.857,27.531 R11.1
NetR14_1: R14.1 U1.23 | length 15.6
  Top Layer w0.2: U1.23 55.953,23.167 55.953,24.165 56.524,24.737 56.524,25.626 v2(57.286,26.388)
  Bottom Layer w0.508: v2(57.286,26.388) 58.429,27.531 R14.1
NetR15_1: R15.1 U1.21 | length 28.2
  Top Layer w0.2: U1.21 56.778,22.861 56.778,23.34 v2(57.286,23.848)
  Bottom Layer w0.508: v2(57.286,23.848) 59.064,23.848 61.604,26.388 61.604,45.438 62.112,45.946 R15.1
NetR21_2: R21.2 U1.8 | length 2.9
  Top Layer w0.2: R21.2 53.794,17.307 53.794,17.614 U1.8
NetR24_1: R24.1 TP7.1 | length 4.4
  Top Layer w0.2: R24.1 66.176,13.18 TP7.1
NetR27_2: R27.2 U1.10 | length 4.5
  Top Layer w0.2: R27.2 54.238,15.72 54.238,16.355 55.953,18.069 55.953,18.433 U1.10
PG: R34.2 TP10.1 U1.4 | length 15.4
  Top Layer w0.2: TP10.1 49.539,12.799 49.539,16.293 R34.2 51.887,18.641 52.558,18.641 U1.4
PGND: C1.2 C2.1 C3.1 C4.1 C5.1 C6.1 C7.1 C8.1 C9.1 C10.2 C11.2 C12.1 C13.1 C14.1 C15.1 C16.1 C17.1 C18.1 C19.1 C20.1 C21.1 C22.1 C23.1 C24.2 C27.1 C28.1 C31.2 C32.2 C34.2 D2.1 J3.1 J4.1 Q3.S Q4.S SB5.2 TP3.1 TP4.1 U1.25 U1.33 | length 3.7
  Top Layer w0.2: U1.25 55,22.78 v3(55,22.356) ; U1.25@54.767,23.016 54.767,23.238 ; 54.885,22.668 54.885,22.89
  Bottom Layer w1.079: 58.302,44.803 58.905,45.406 C28.1
  other v1: 103.514,15.974 72.145,19.403 18.678,34.77 19.948,34.77 90.052,34.77 91.322,34.77 17.408,36.04 18.678,36.04 19.948,36.04 23.758,36.04 25.028,36.04 26.298,36.04 27.568,36.04 28.838,36.04 30.108,36.04 31.378,36.04 32.648,36.04 33.918,36.04 35.188,36.04 36.458,36.04 37.728,36.04 38.998,36.04 40.268,36.04 41.538,36.04 68.462,36.04 69.732,36.04 71.002,36.04 72.272,36.04 73.542,36.04 74.812,36.04 76.082,36.04 77.352,36.04 78.622,36.04 79.892,36.04 81.162,36.04 82.432,36.04 83.702,36.04 84.972,36.04 86.242,36.04 90.052,36.04 91.322,36.04 92.592,36.04 17.408,37.31 18.678,37.31 19.948,37.31 23.758,37.31 25.028,37.31 26.298,37.31 27.568,37.31 28.838,37.31 30.108,37.31 31.378,37.31 32.648,37.31 33.918,37.31 35.188,37.31 36.458,37.31 37.728,37.31 38.998,37.31 40.268,37.31 41.538,37.31 60.715,37.31 68.462,37.31 69.732,37.31 71.002,37.31 72.272,37.31 73.542,37.31 74.812,37.31 76.082,37.31 77.352,37.31 78.622,37.31 79.892,37.31 81.162,37.31 82.432,37.31 83.702,37.31 84.972,37.31 86.242,37.31 90.052,37.31 91.322,37.31 92.592,37.31 59.826,38.834 103.975,39.399 43.062,39.596 45.729,39.596 48.396,39.596 62.62,39.596 63.89,39.596 66.938,39.596 49.92,43.66 51.19,43.66 52.46,43.66 55,43.66 56.27,43.66 57.54,43.66 58.81,43.66 49.92,44.93 51.19,44.93 52.46,44.93 55,44.93 56.27,44.93 57.54,44.93 58.81,44.93
  other v2: 13.09,24.944 96.91,24.944 9.554,26.408 16.626,26.408 93.374,26.408 100.446,26.408 8.09,29.944 18.09,29.944 91.91,29.944 101.91,29.944 9.554,33.48 16.626,33.48 93.374,33.48 100.446,33.48 13.09,34.944 96.91,34.944
  other v3: 55,19.244 54.222,20.022 55.778,20.022 53.444,20.8 55,20.8 56.556,20.8 54.222,21.578 55.778,21.578
PWM: P2.2 U1.3 | length 29.5
  Top Layer w0.2: P2.2 31.124,9.624 43.57,9.624 46.618,12.672 46.618,14.45 51.698,19.53 52.881,19.53 U1.3
SNS1_N: R8.2 SB2.1 | length 21.7
  Top Layer w0.2: v1(46.309,26.007) 46.309,25.499 46.11,25.3 46.11,24.639 46.616,24.133 R8.2
  Bottom Layer w0.2: v1(43.57,43.406) 43.262,43.098 43.262,41.047 46.11,38.199 46.11,26.714 46.309,26.515 v1(46.309,26.007)
SNS1_P: R7.2 SB1.1 | length 22
  Top Layer w0.2: v1(45.511,26.007) 45.511,25.499 45.71,25.3 45.71,24.473 46.333,23.85 R7.2
  Bottom Layer w0.2: v1(42.554,43.406) 42.862,43.098 42.862,40.881 45.71,38.033 45.71,26.714 45.511,26.515 v1(45.511,26.007)
SNS2_N: R20.1 SB4.1 | length 22
  Top Layer w0.2: R20.1 63.667,23.85 64.29,24.473 64.29,25.3 64.489,25.499 v1(64.489,26.007)
  Bottom Layer w0.2: v1(64.489,26.007) 64.489,26.515 64.29,26.714 64.29,38.033 67.138,40.881 67.138,43.098 v1(67.446,43.406)
SNS2_P: R19.1 SB3.1 | length 21.7
  Top Layer w0.2: R19.1 63.384,24.133 63.89,24.639 63.89,25.3 63.691,25.499 v1(63.691,26.007)
  Bottom Layer w0.2: v1(63.691,26.007) 63.691,26.515 63.89,26.714 63.89,38.199 66.738,41.047 66.738,43.098 v1(66.43,43.406)
VCC: C32.1 D6.1 D8.1 R28.2 R34.1 U1.24 | length 34.7
  Top Layer w0.2: U1.24@55.227,23.126 55.227,23.348
  Top Layer w0.254: R28.2 48.777,18.26 v1(48.777,18.895) 49.985,18.895 R34.1 ; v1(48.841,25.689) 48.853,25.702 D6.1 ; C32.1 56.063,26.737 56.747,27.421 60.42,27.421 D8.1
  Bottom Layer w0.254: v1@48.802,18.895 53.857,18.895 55.527,20.565 55.527,21.035 53.991,22.571 ; v1(48.841,25.689) 52.358,22.172 53.197,22.172 53.596,22.571 ; v1(55.635,25.753) 55.635,24.61 53.991,22.966 ; 53.596,22.571 53.991,22.966 ; 53.596,22.571 53.991,22.571 ; 53.991,22.571 53.991,22.966
VHI: P1.1 P2.3 P3.3 R17.1 R18.2 | length 42.1
  Top Layer w0.254: R17.1 R18.2 17.154,8.354 P1.1 18.805,6.195 25.155,6.195 P2.3 28.965,6.195 48.015,6.195 P3.3
VIN: C1.1 C2.2 C3.2 C4.2 C5.2 C11.1 C12.2 C13.2 C14.2 C15.2 C16.2 C31.1 J1.1 R1.1 R17.2 SB1.2 TP1.1 U1.30 | length 63.7
  Top Layer w0.2: v1(14.487,13.942) R17.2 ; C31.1 51.896,23.055 U1.30
  Bottom Layer w0.254: 6.359,40.987 6.359,15.974 7.121,15.212 13.217,15.212 v1(14.487,13.942)
  Bottom Layer w0.508: 40.903,40.866 40.903,39.977 43.57,37.31 43.57,25.118 44.586,24.102 48.396,24.102 v2(50.682,21.816)
  other v1: 17.408,42.136 18.678,42.136 19.948,42.136 17.408,43.406 18.678,43.406 19.948,43.406 23.758,43.406 25.028,43.406 26.298,43.406 27.568,43.406 28.838,43.406 30.108,43.406 31.378,43.406 32.648,43.406 33.918,43.406 35.188,43.406 36.458,43.406 37.728,43.406 38.998,43.406 40.268,43.406 18.678,44.676 19.948,44.676 23.758,44.676 25.028,44.676 26.298,44.676 27.568,44.676 28.838,44.676 30.108,44.676 31.378,44.676 32.648,44.676 33.918,44.676 35.188,44.676 36.458,44.676 37.728,44.676 38.998,44.676 40.268,44.676 38.998,45.946 40.268,45.946 38.998,47.216 40.268,47.216
  other v2: 13.09,43.994 9.554,45.458 16.626,45.458 8.09,48.994 18.09,48.994 9.554,52.53 16.626,52.53 13.09,53.994
VOUT: C6.2 C7.2 C8.2 C9.2 C10.1 C19.2 C20.2 C21.2 C22.2 C23.2 C24.1 C34.1 J2.1 JP1.1 R2.2 R31.2 SB4.2 TP2.1 U1.19 | length 117.4
  Top Layer w0.2: R31.2 v1(44.713,18.768) ; U1.19 58.104,23.055 C34.1
  Bottom Layer w0.254: v1(44.713,18.768) 47.761,18.768 48.396,18.133 61.223,18.133 63.255,20.165 69.923,20.165 ; JP1.1 70.24,19.847 ; 70.245,19.854 70.556,20.165 ; 70.562,20.171 70.556,20.165 ; 103.285,40.764 103.285,17.269 102.371,16.355 76.336,16.355 72.526,20.165 70.556,20.165 ; 69.923,20.165 70.24,20.165 ; 69.923,20.165 70.24,19.847 ; 70.24,19.847 70.24,20.165 ; 70.24,20.165 70.556,20.165
  Bottom Layer w0.508: v2(59.318,21.816) 61.604,24.102 65.414,24.102 66.43,25.118 66.43,37.31 69.097,39.977 69.097,40.866
  other v1: 90.052,42.136 91.322,42.136 92.592,42.136 69.732,43.406 71.002,43.406 72.272,43.406 73.542,43.406 74.812,43.406 76.082,43.406 77.352,43.406 78.622,43.406 79.892,43.406 81.162,43.406 82.432,43.406 83.702,43.406 84.972,43.406 86.242,43.406 90.052,43.406 91.322,43.406 92.592,43.406 69.732,44.676 71.002,44.676 72.272,44.676 73.542,44.676 74.812,44.676 76.082,44.676 77.352,44.676 78.622,44.676 79.892,44.676 81.162,44.676 82.432,44.676 83.702,44.676 84.972,44.676 86.242,44.676 90.052,44.676 91.322,44.676 69.732,45.946 71.002,45.946 69.732,47.216 71.002,47.216
  other v2: 96.91,43.994 93.374,45.458 100.446,45.458 91.91,48.994 101.91,48.994 93.374,52.53 100.446,52.53 96.91,53.994
pads on no net: H1.1 H2.1 H3.1 H4.1 Q1. Q2. Q3. Q4. U1.2 U1.7 U1.9 U1.13

## Polygon pours and split planes (outlines as drawn)
VOUT on Top Layer "LED-" (solid, remove dead copper, pour order 93): 59.445,21.625 59.572,21.752 59.572,22.959 59.382,23.149 58.048,23.149 57.35,22.451 57.35,22.197 58.429,22.197 59.001,21.625
VIN on Top Layer "LED-" (solid, remove dead copper, pour order 92): 50.555,21.625 50.428,21.752 50.428,22.959 50.619,23.149 51.952,23.149 52.651,22.451 52.651,22.197 51.571,22.197 51,21.625
PGND on Top Layer "LED-" (solid, remove dead copper, pour order 87): 48.396,39.85 49.158,40.612 49.158,46.2 49.666,46.708 52.714,46.708 52.968,46.454 52.968,44.422 53.476,43.914 54.238,43.914 54.746,44.422 54.746,46.2 55.254,46.708 58.81,46.708 59.064,46.454 59.064,44.422 59.572,43.914 60.334,43.914 60.842,43.406 60.842,40.612 61.604,39.85 61.604,39.088 48.396,39.088
AGND on Top Layer "LED-" (solid, remove dead copper, pour order 55): 15.63,14.704 34.045,14.704 39.125,19.784 43.316,19.784 45.348,17.752 55.127,17.752 57.159,19.784 70.875,19.784 75.955,14.704 94.37,14.704 94.878,14.196 94.878,6.068 94.37,5.56 15.63,5.56 15.122,6.068 15.122,14.196
PGND on Top Layer "LED-" (solid, remove dead copper, pour order 82): 5.724,39.596 6.232,40.104 103.768,40.104 104.276,39.596 104.276,15.72 103.768,15.212 6.232,15.212 5.724,15.72
NetC17_2 on Top Layer "LED-" (solid, remove dead copper, pour order 89): 48.65,49.502 48.142,50.01 43.824,50.01 43.316,49.502 43.316,41.12 43.824,40.612 48.142,40.612 48.65,41.12
NetC18_2 on Top Layer "LED-" (solid, remove dead copper, pour order 88): 61.35,49.502 61.858,50.01 66.176,50.01 66.684,49.502 66.684,41.12 66.176,40.612 61.858,40.612 61.35,41.12
NetC26_1 on Top Layer "LED-" (solid, remove dead copper, pour order 86): 66.684,68.806 66.176,69.314 56.016,69.314 55.508,68.806 55.508,47.724 56.016,47.216 60.334,47.216 60.842,47.724 60.842,50.01 61.35,50.518 66.176,50.518 66.684,51.026
NetC25_1 on Top Layer "LED-" (solid, remove dead copper, pour order 85): 54.492,68.806 53.984,69.314 43.824,69.314 43.316,68.806 43.316,54.074 43.824,53.566 44.332,53.566 44.84,53.058 44.84,51.026 45.348,50.518 48.65,50.518 49.158,50.01 49.158,47.724 49.666,47.216 53.984,47.216 54.492,47.724
VIN on Top Layer "LED-" (solid, remove dead copper, pour order 84): 42.3,40.612 42.808,41.12 42.808,68.806 42.3,69.314 15.63,69.314 5.724,59.408 5.724,41.12 6.232,40.612
VOUT on Top Layer "LED-" (solid, remove dead copper, pour order 83): 67.7,40.612 67.192,41.12 67.192,68.806 67.7,69.314 94.37,69.314 104.276,59.408 104.276,41.12 103.768,40.612
VCC on Top Layer "LED-" (solid, remove dead copper, pour order 52): 55.127,27.15 55.254,27.277 56.524,27.277 56.651,27.15 56.651,24.229 55.381,22.959 55.254,22.959 55.127,23.086
VOUT on Bottom Layer "LED-" (solid, remove dead copper, pour order 78): 67.7,40.612 67.192,41.12 67.192,68.806 67.7,69.314 94.37,69.314 104.276,59.408 104.276,41.12 103.768,40.612
AGND on Bottom Layer "LED-" (solid, remove dead copper, pour order 57): 15.63,14.704 34.045,14.704 39.125,19.784 43.316,19.784 44.713,18.387 54.873,18.387 56.27,19.784 70.875,19.784 75.955,14.704 94.37,14.704 94.878,14.196 94.878,6.068 94.37,5.56 15.63,5.56 15.122,6.068 15.122,14.196
PGND on Bottom Layer "LED-" (solid, remove dead copper, pour order 91): 5.724,38.58 7.248,40.104 103.768,40.104 104.276,39.596 104.276,15.72 103.768,15.212 6.232,15.212 5.724,15.72
PGND on Bottom Layer "LED-" (solid, remove dead copper, pour order 90): 48.396,39.85 49.158,40.612 49.158,46.2 49.666,46.708 52.714,46.708 52.968,46.454 52.968,44.422 53.476,43.914 54.238,43.914 54.746,44.422 54.746,46.2 55.254,46.708 58.81,46.708 59.064,46.454 59.064,44.422 59.572,43.914 60.334,43.914 60.842,43.406 60.842,40.612 61.604,39.85 61.604,39.088 48.396,39.088
NetC25_1 on Bottom Layer "LED-" (solid, remove dead copper, pour order 75): 54.492,68.806 53.984,69.314 43.824,69.314 43.316,68.806 43.316,54.074 43.824,53.566 44.332,53.566 44.84,53.058 44.84,51.026 45.348,50.518 48.65,50.518 49.158,50.01 49.158,47.724 49.666,47.216 53.984,47.216 54.492,47.724
NetC26_1 on Bottom Layer "LED-" (solid, remove dead copper, pour order 76): 66.684,68.806 66.176,69.314 56.016,69.314 55.508,68.806 55.508,47.724 56.016,47.216 60.334,47.216 60.842,47.724 60.842,50.01 61.35,50.518 66.176,50.518 66.684,51.026
NetC18_2 on Bottom Layer "LED-" (solid, remove dead copper, pour order 77): 61.35,49.502 61.858,50.01 66.176,50.01 66.684,49.502 66.684,41.12 66.176,40.612 61.858,40.612 61.35,41.12
VIN on Bottom Layer "LED-" (solid, remove dead copper, pour order 80): 42.3,40.612 42.808,41.12 42.808,68.806 42.3,69.314 15.63,69.314 5.724,59.408 5.724,41.12 6.232,40.612
NetC17_2 on Bottom Layer "LED-" (solid, remove dead copper, pour order 81): 48.65,49.502 48.142,50.01 43.824,50.01 43.316,49.502 43.316,41.12 43.824,40.612 48.142,40.612 48.65,41.12

## Other copper
Top Layer:
  pour cut-out: 5,60 5,70 15,70 15,65 cw(c10,65) 10,60
  pour cut-out: 105,60 105,70 95,70 95,65 ccw(c100,65) 100,60
  pour cut-out: 15,5 5,5 5,15 10,15 cw(c10,10) 15,10
  pour cut-out: 105,15 105,5 95,5 95,10 cw(c100,10) 100,15
Bottom Layer:
  pour cut-out: 15,5 5,5 5,15 10,15 cw(c10,10) 15,10
  pour cut-out: 5,60 5,70 15,70 15,65 cw(c10,65) 10,60
  pour cut-out: 105,60 105,70 95,70 95,65 ccw(c100,65) 100,60
  pour cut-out: 105,15 105,5 95,5 95,10 cw(c100,10) 100,15

## Silkscreen, mask and mechanical layers (free items; w line width, h text height)
Top Overlay:
  lines w0.152: 62.366,20.038 62.112,20.038 63.128,21.054 64.398,21.054 ; 66.176,19.276 65.922,19.276 66.938,20.292 ; 83.194,16.863 ccw(c83.956,16.863) 83.956,16.101 102.625,16.101 ccw(c102.625,16.863) 103.387,16.863 103.387,20.038 ccw(c102.625,20.038) 102.625,20.8 83.956,20.8 ccw(c83.956,20.038) 83.194,20.038 83.194,16.863
  text "SW1" at 44.582,57.814 h1.02
  text "SW2" at 63.581,57.814 h1.02
  text "VIN" at 11.648,56.09 h2.03
  text "VOUT" at 94.404,56.092 h2.03
  text "PGND" at 10.576,21.802 h2.03
  text "PGND" at 94.396,21.802 h2.03
  text "SC8701-EVM-RE1" at 83.956,18.337 h2.54
  text "OldGerman" at 83.956,16.884 h1.52
  text "2023/06" at 97.783,16.884 h1.52
  text "VOUT" at 68.989,15.904 h1.02
  text "ADJ" at 69.369,12.861 h1.02
  text "For ILIM1" at 69.602,10.066 h1.02
  text "For ILIM2" at 84.791,10.066 h1.02
  text "VHI" at 16.174,5.743 h1.02
  text "/CE" at 18.705,5.744 h1.02
  text "AGND" at 20.667,5.744 h1.02
  text "VHI" at 26.334,5.743 h1.02
  text "PWM" at 28.557,5.743 h1.02
  text "AGND" at 30.827,5.744 h1.02
  text "AGND" at 35.907,5.744 h1.02
  text "PG" at 44.245,5.744 h1.02
  text "VHI" at 49.194,5.743 h1.02
  text "IPWM" at 51.289,5.743 h1.02
  text "AGND" at 53.687,5.744 h1.02
  text "AGND" at 58.767,5.744 h1.02
  text "ITUNE" at 66.393,5.749 h1.02
  text "AGND" at 71.467,5.744 h1.02
  text "ILIM1" at 76.806,5.742 h1.02
  text "ITUNE" at 81.633,5.749 h1.02
  text "AGND" at 86.707,5.744 h1.02
  text "ILIM2" at 91.995,5.742 h1.02
Bottom Overlay:
  text "JLCJLCJLCJLC" at 93.472,66.661 h2.03
Mechanical 1:
  the board outline again, w0.254
Mechanical 5:
  lines w0.152: 54,-30 56,-30 ; 55,-31 55,-29
Mechanical 13:
  lines w0.152: 50.665,19.293 cw(c52.172,20.8) 50.665,22.307 ; 53.493,16.465 ccw(c55,17.972) 56.507,16.465 ; 53.493,25.135 cw(c55,23.628) 56.507,25.135 ; 59.335,19.293 ccw(c57.828,20.8) 59.335,22.307 ; 49.158,20.8 55,26.642 60.842,20.8 55,14.958 49.158,20.8
Mechanical 15:
  lines w0.152: 5,60 10,60 ccw(c10,65) 15,65 15,70 5,70 5,60
Drill Drawing:
  text ".Legend" at 6.65,72.267 h0.7

## Dimensions
105,5 to 105,70 on Mechanical 5
5,70 to 105,70 on Mechanical 5